# Altium PCB Aurora.PcbDoc
Units mil, origin at the board's own origin, x right, y up, seen from the top; angles counter-clockwise.
Board outline 1889.76 x 1181.1 mil, 2 copper layers (Top Layer, Bottom Layer), stack 61.811 mil thick; 17 components, 17 nets, 84 pads, 10 vias.
Unrouted connection lines stored in the file: 2.
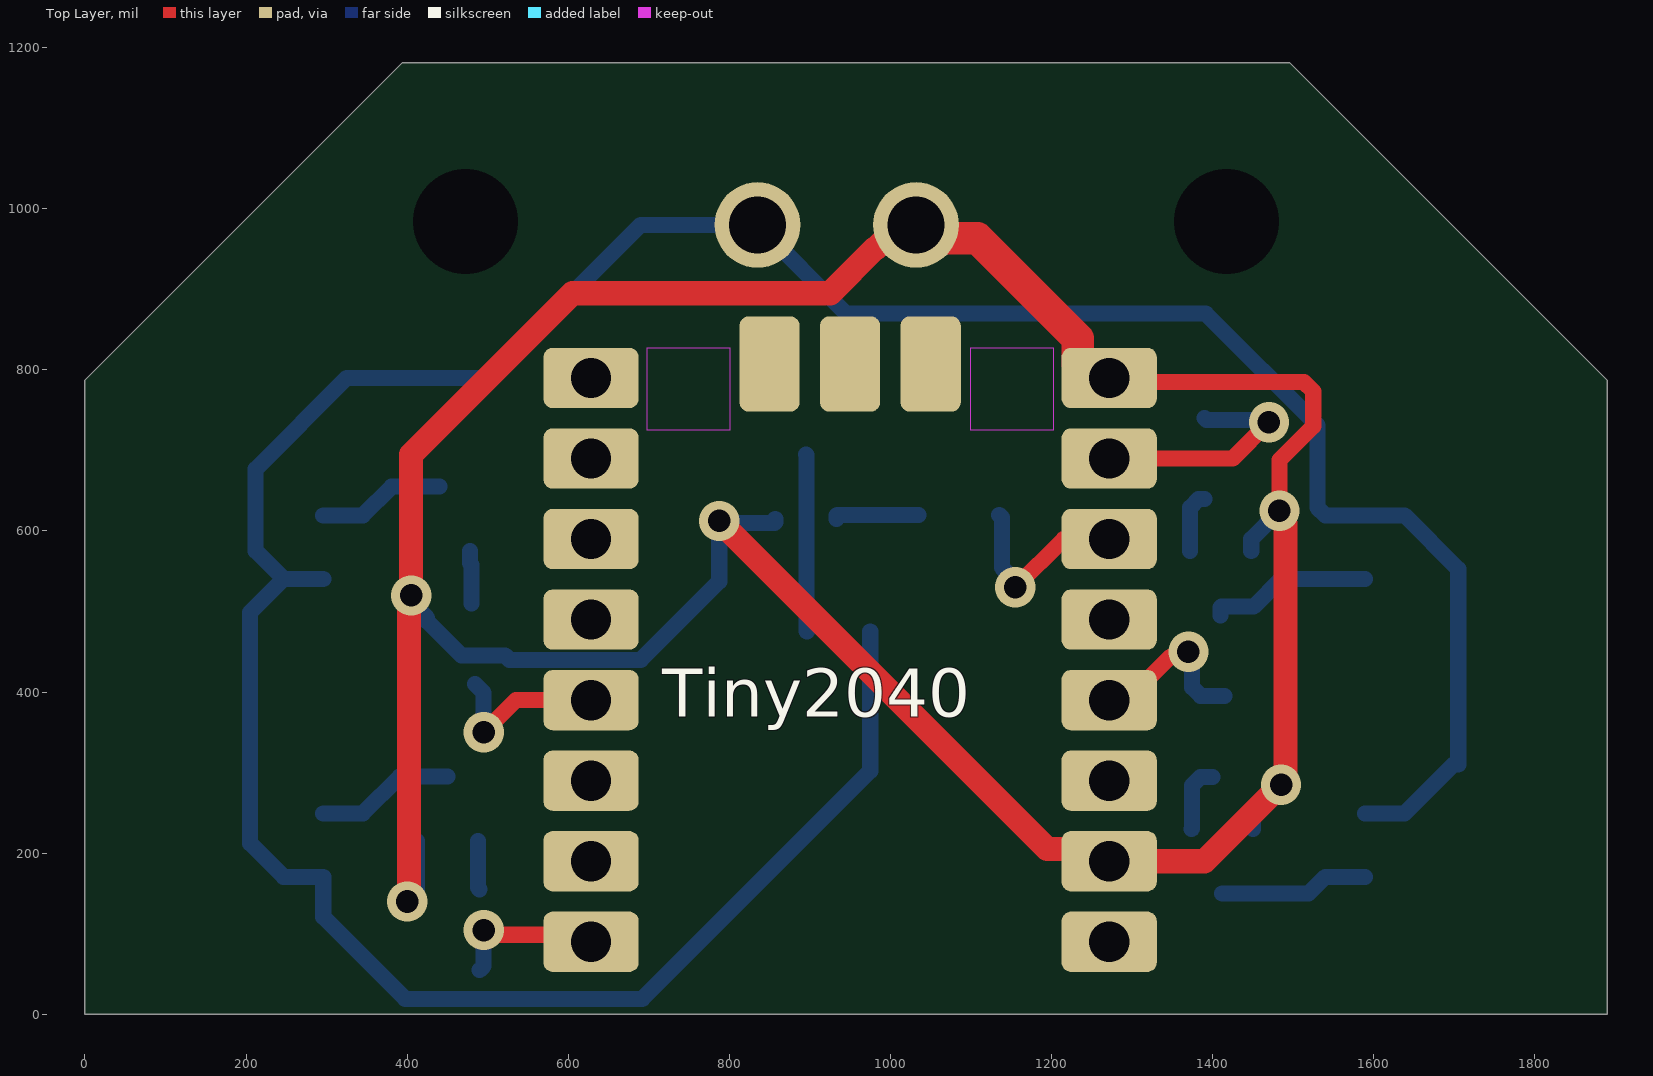
[diagram p0: Top Layer view]
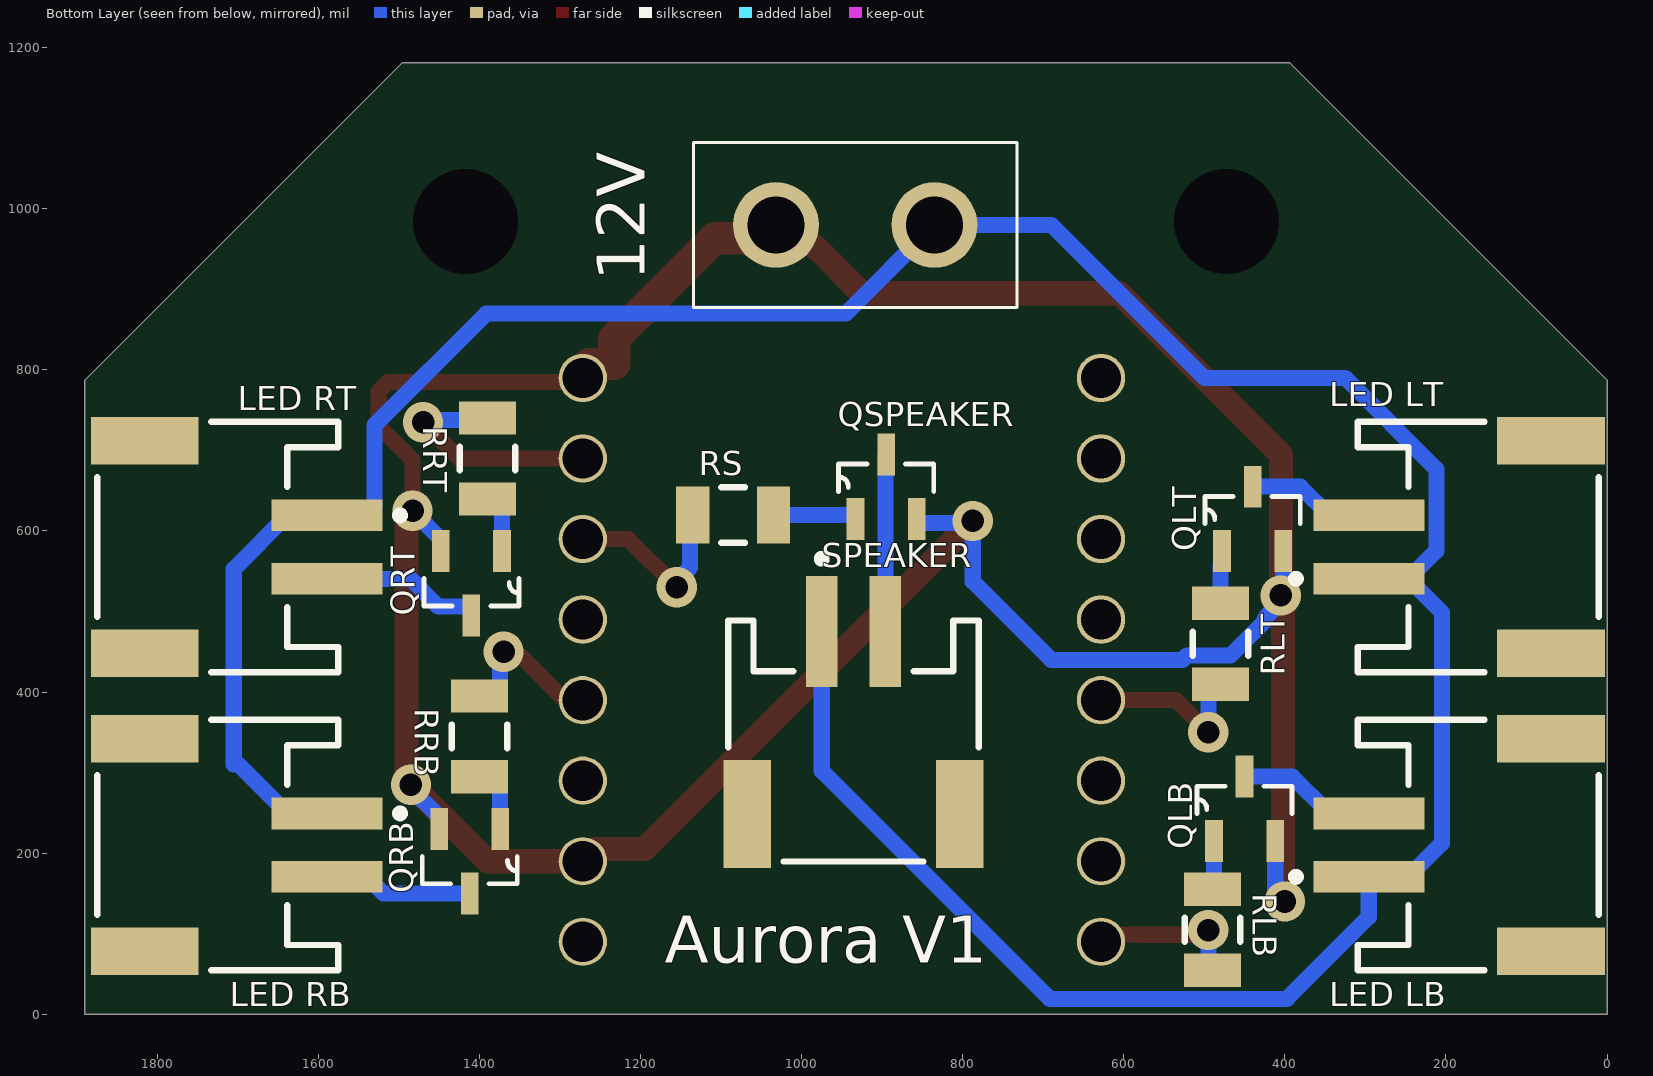
[diagram p1: Bottom Layer view, seen from below]
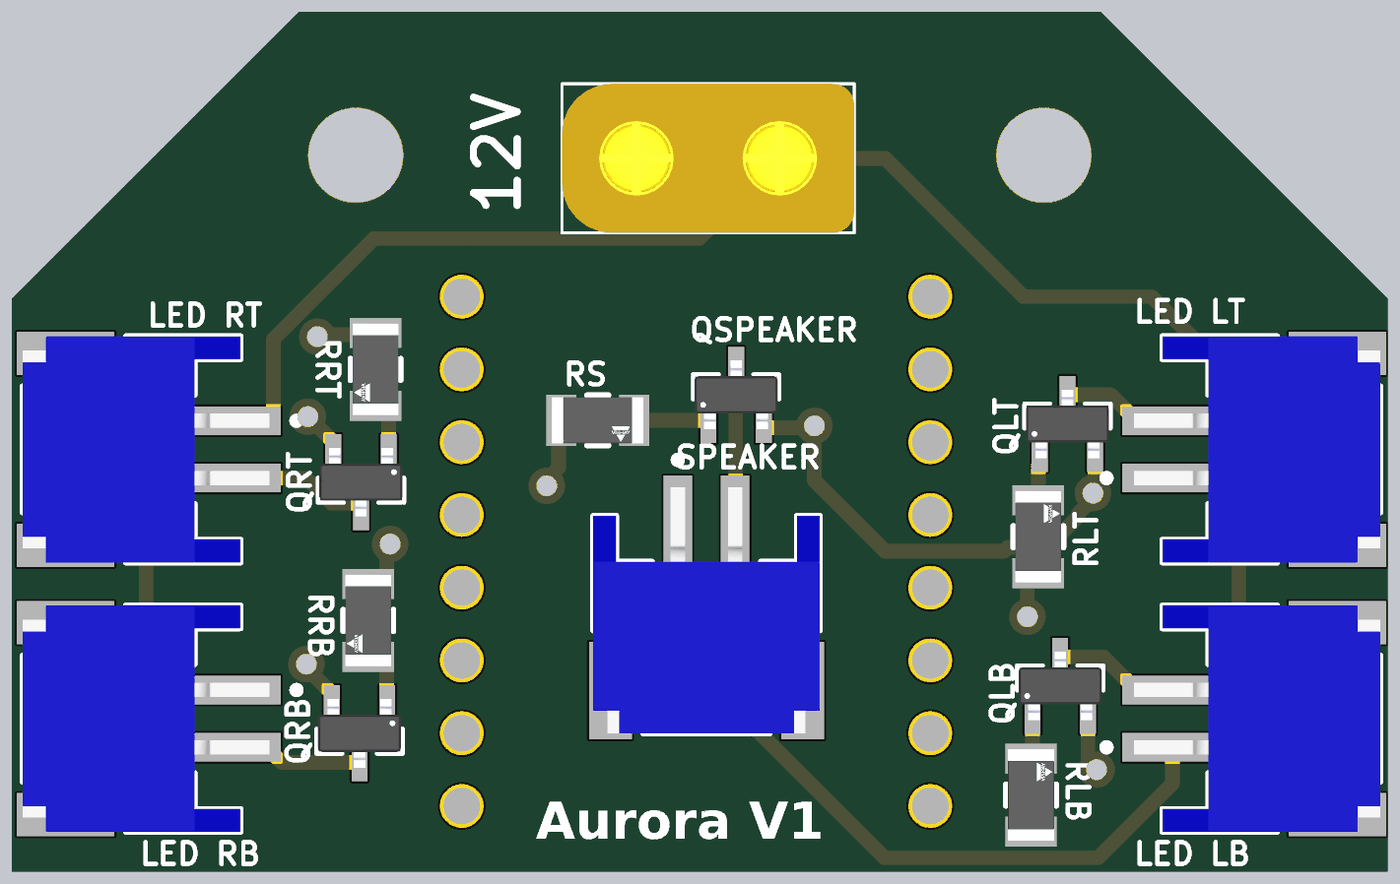
[diagram p2: 3D render of the assembled board from below, using the file's embedded part models]

## Layer stack, top to bottom
Top Solder: solder mask 0.5, Solder Resist, Dk 3.8
Top Layer: signal copper 1.378
Dielectric: core 59.0551, FR-4, Dk 4.5
Bottom Layer: signal copper 1.378
Bottom Solder: solder mask 0.5, Solder Resist, Dk 3.8

## Board outline
0,0 1889.76,0 1889.76,787.4 1496.06,1181.1 393.7,1181.1 0,787.4

## Design rules (kind name [scope] priority, off if disabled: settings)
BoardOutlineClearance [All] p1: gap=7.87 ignorepadtopadclearanceinfootprint=FALSE
Clearance [All] p1: gap=5 ignorepadtopadclearanceinfootprint=FALSE except(9.84: Arc-Hole Track-Hole SMDPad-Hole THPad-Hole Via-Hole Fill-Hole Poly-Hole Region-Hole Text-Hole)
ComponentClearance [All] p1: gap=5 collisioncheckmode=3 verticalgap=5 showdistances=TRUE
DiffPairsRouting [All] p1: maxlimit=10 minlimit=5 mostfreqgap=5 toplayer_minwidth=5 toplayer_maxwidth=1000 toplayer_prefwidth=5 bottomlayer_minwidth=5 bottomlayer_maxwidth=1000 bottomlayer_prefwidth=5 maxuncoupledlength=500
Height [All] p1: minheight=0 maxheight=71497.94 prefheight=500
HoleSize [All] p1: absolutevalues=TRUE maxlimit=248.03 minlimit=11.81 maxpercent=80.000 minpercent=20.000
HoleToHoleClearance [All] p1: gap=9.84 allowstackedmicrovias=FALSE
MinimumAnnularRing [All] p1: minimumring=3
MinimumSolderMaskSliver [All] p1: minsoldermaskwidth=0
PlaneClearance [All] p1: clearance=5
PlaneConnect PlaneConnectPowerPads [InPadClass('PowerPads')] p1: planeconnectstyle=Direct reliefexpansion=20 reliefentries=4 reliefconductorwidth=10 reliefairgap=10
PlaneConnect [All] p2: pad.planeconnectstyle=Relief pad.reliefexpansion=11.81 pad.reliefentries=4 pad.reliefconductorwidth=5 pad.reliefairgap=5 via.planeconnectstyle=Direct via.reliefexpansion=11.81 via.reliefentries=4 via.reliefconductorwidth=5 via.reliefairgap=5
PolygonConnect PolygonConnectPowerPads [All vs (InPadClass('PowerPads'))] p1: connectstyle=Direct reliefconductorwidth=10 reliefentries=4 polygonreliefangle="90 Angle" airgapwidth=10
PolygonConnect [All] p2: thpad.connectstyle=Relief thpad.reliefconductorwidth=5 thpad.reliefentries=4 thpad.polygonreliefangle="90 Angle" thpad.airgapwidth=5 smdpad.connectstyle=Relief smdpad.reliefconductorwidth=5 smdpad.reliefentries=4 smdpad.polygonreliefangle="90 Angle" smdpad.airgapwidth=5 via.connectstyle=Direct via.reliefconductorwidth=5 via.reliefentries=4 via.polygonreliefangle="90 Angle" via.airgapwidth=5
RoutingVias [All] p1: holewidth=11.81 width=23.62 viastyle="Through Hole" minholewidth=11.81 minwidth=23.62 maxholewidth=23.62 maxwidth=259.84
SMDNeckDown [All] p1: percent=50.000
SilkToSilkClearance [All] p1: silktosilkclearance=0
SilkToSolderMaskClearance [IsPad] p1: minsilkscreentomaskgap=5 clearancetoexposedcopper=TRUE
SolderMaskExpansion SolderMaskExpansion_1 [IsVia] p1: expansion=2.95 istentingtop=TRUE
SolderMaskExpansion [All] p2: expansion=2.95 istentingtop=FALSE
Width [All] p1: maxlimit=1000 minlimit=5 preferedwidth=20 minimp=50.000000 maximp=50.000000 favimp=50.000000
20 further rules are at their usual default settings.

## Components (designator, comment, footprint, x,y, rotation, side; value= is the part's Value field where it differs from the comment)
12V "XT30PB" XT30PB 835,980 r270 bottom
"LED LB" "S2B-PH-SM4-TB(LF)(SN)" "JST- S2B-PH-SM4-TB(LF)(SN)-2_V" 160,210 r90 bottom
"LED LT" "S2B-PH-SM4-TB(LF)(SN)" "JST- S2B-PH-SM4-TB(LF)(SN)-2_V" 160,580 r90 bottom
"LED RB" "S2B-PH-SM4-TB(LF)(SN)" "JST- S2B-PH-SM4-TB(LF)(SN)-2_V" 1725,210 r270 bottom
"LED RT" "S2B-PH-SM4-TB(LF)(SN)" "JST- S2B-PH-SM4-TB(LF)(SN)-2_V" 1725,580 r270 bottom
QLB "DMG6968U-7" SOT95P240X110-3N 450,255 r90 bottom
QLT "DMG6968U-7" SOT95P240X110-3N 440,615 r90 bottom
QRB "DMG6968U-7" SOT95P240X110-3N 1412,190 r270 bottom
QRT "DMG6968U-7" SOT95P240X110-3N 1410,535 r270 bottom
QSPEAKER "DMG6968U-7" SOT95P240X110-3N 895,655 r90 bottom
RLB "CRCW1206100RFKEA" FP-CRCW1206-e3-MFG 490,105 r90 bottom
RLT "CRCW1206100RFKEA" FP-CRCW1206-e3-MFG 480,460 r90 bottom
RRB "CRCW1206100RFKEA" FP-CRCW1206-e3-MFG 1400,345 r270 bottom
RRT "CRCW1206100RFKEA" FP-CRCW1206-e3-MFG 1390,690 r270 bottom
RS "CRCW1206100RFKEA" FP-CRCW1206-e3-MFG 1085,620 r180 bottom
SPEAKER "S2B-PH-SM4-TB(LF)(SN)" "JST- S2B-PH-SM4-TB(LF)(SN)-2_V" 935.63,339.17 r180 bottom
Tiny2040 "TINY2040" TINY2040 950,40 r90 top

## Footprints (in the part's own frame and the unit in brackets; to place one, negate y for a bottom-side part, rotate by r counter-clockwise, add the part's x,y. Pads: shape width x height; smd on the part's side, far side on the other; paste and mask are expansions set on the pad)
FP-CRCW1206-e3-MFG [mm]
  rect 1.05x1.8 smd paste+0 mask+0: 1(-1.275,0) 2(1.275,0)
  silkscreen extent -0.38,-0.87 0.38,0.87, body extent -1.6,-0.8 1.6,0.8, height 0.6
"JST- S2B-PH-SM4-TB(LF)(SN)-2_V" [mm] "SMD, 2-Leads, Body 7.9x7.6mm, Pitch 2mm"
  rect 1x3.5 smd: 1(-1,3.45) 2(1,3.45)
  rect 1.5x3.4 smd: MP1(-3.35,-2.3) MP2(3.35,-2.3)
  silkscreen extent -3.95,-3.8 3.95,5.88, body extent -3.95,-3.8 3.95,4.8, height 5.6
SOT95P240X110-3N [mil]
  rect 52x22 smd: 1(-40,38) 2(-40,-38) 3(40,0)
  silkscreen extent -6,-59 28,59, body extent -47,-57 47,57, height 43
TINY2040 [mil]
  rrect30% 74.8x118.11 smd: 0(50,321.65) 1(150,321.65) 2(250,321.65) 3(350,321.65) 3V3(250,-321.65) 4(450,321.65) 5(550,321.65) 5V(50,-321.65) 6(650,321.65) 7(750,321.65) A0(650,-321.65) A1(550,-321.65) A2(450,-321.65) A3(350,-321.65) GND1(150,-321.65) GND2(750,-321.65)
  round 60 hole 50: 8(50,-321.65) 9(150,-321.65) 10(250,-321.65) 11(350,-321.65) 12(450,-321.65) 13(550,-321.65) 14(650,-321.65) 15(750,-321.65) 16(750,321.65) 17(650,321.65) 18(550,321.65) 20(350,321.65) 21(250,321.65) 22(150,321.65) 23(50,321.65) 24(450,321.65)
  rrect30% 118.11x74.8 smd: GND3(767.32,0) SWCLK(767.32,-100) SWDIO(767.32,100)
  Top Layer keep-out region: 685.04,149.61 685.04,251.97 787.4,251.97 787.4,149.61
  Top Layer keep-out region: 685.04,-251.97 685.04,-149.61 787.4,-149.61 787.4,-251.97
XT30PB [mm]
  round 2.7 hole 1.8: 1(0,0) 2(0,-5)
  silkscreen extent -2.6,-7.6 2.6,2.6, body extent -2.6,-7.6 2.6,2.6, height 10.66

## Part data
12V: "Connector", Manufacturer_Name=Amass, Datasheet Link=https://www.tme.eu/Document/4acc913878197f8c2e30d4b8cdc47230/XT30UPB%20SPEC.pdf, Height=10.7mm, Manufacturer_Part_Number=XT30PB
"LED LB" "LED LT" "LED RB" "LED RT" SPEAKER: library part CMP-1755-00001-1, "Male Header, Pitch 2 mm, 1 x 2 Position, Height 5.5 mm, -25 to 85 degC, RoHS, Tape and Reel", Colour=Black, Current Rating="3 A", Max Operating Temperature=105degC, Min Operating Temperature=-65degC, Package Quantity=100, ComponentLink1Description="Manufacturer URL", ComponentLink1URL=http://www.jst.com/home2.html, ComponentLink2Description=Datasheet, ComponentLink2URL=http://www.jst-mfg.com/product/pdf/eng/ePH.pdf, Contact Finish=Lead, Contact Material=Bronze, Contact Plating=Tin, DatasheetVersion=Dec-12, Height="8.13 mm", Lead Pitch="0.1 inch", Length="101.19 mm", Mount="Through Hole", PackageDescription="Male Header, Pitch 2 mm, 1 x 2 Position, Height 5.5 mm", PackageReference=S2B-PH-SM4-TB(LF)(SN)-2, Packaging=Bulk, Pins=40, Radiation Hardening=No, RoHSCompliant=True, Width="2.34 mm"
QLB QLT QRB QRT QSPEAKER: "N-CHANNEL ENHANCEMENT MODE MOSFET", Package=None, Availability=Unavailable, MF="{'manufacturer': u'Diodes Zetex'}", MP=DMG6968U-7, Price=None
RLB RLT RRB RRT RS: library part CMP-2003-04801-2, "RES Thick Film, 100Ω, 1%, 0.25W, 100ppm/°C, 1206", Case Code (Imperial)=1206, Case Code (Metric)=3216, Max Operating Temperature=155°C, Min Operating Temperature=-55°C, Package Quantity=5000, Power Rating=250mW, Resistance=100R, Temperature Coefficient=100ppm/°C, Tolerance=1%, Voltage Rating=200V, Case/Package=1206, Composition="Thick Film", Contact Plating=Tin, Depth=1.6mm, Height=0.55mm, Lead Free="Lead Free", Length=3.2mm, Military Standard=Not, Mount="Surface Mount", Number of Pins=2, Packaging="Tape and Reel", Radiation Hardening=No, Termination=SMD/SMT, Voltage Rating (DC)=200V, Weight=0.000353oz, Width=1.6mm
Tiny2040: DeviceSetName=TINY2040, GateName_1=G$1, LibraryName=pimoroni-boards2040, Package=TINY2040, SymbolName_1=TINY2040

## Free pads (board coordinates)
  round 60 hole 129.92: 3(472.44,984.25) 6(1417.32,984.25)

## Via types
v1: diameter 50, hole 28, Top Layer to Bottom Layer, tented both sides, 10 vias

## Nets (pads, with @x,y where several pads share a name; then routed paths per layer and width w, separated by ;. In a path a pad name is that pad's centre, name@x,y a point inside that pad or via, vN(x,y) a via of type N, cw(c..) or ccw(c..) an arc to the next point about the centre after c; other vN are vias at no path point)
+12: 12V.1 "LED LB.1" "LED LT.1" "LED RB.1" "LED RT.1" SPEAKER.1 | length 3953.8
  Bottom Layer w20: 295.83,540.63 246.61,540.63 ; SPEAKER.1 975,302.21 691.92,19.13 397.64,19.13 295.83,120.94 295.83,170.63 246.61,170.63 205,212.24 205,499.02 246.61,540.63 ; 1589.17,249.37 1638.39,249.37 1699.02,310 1705,310 1705,552.76 1638.39,619.37 1589.17,619.37 1539.96,619.37 1530.28,629.06 1530.28,731.29 1391.57,870 945,870 12V.1 690,980 500,790 325,790 211.93,676.93 211.93,575.32 246.61,540.63
GND: 12V.2 QLB.2 QLT.2 QRB.2 QRT.2 QSPEAKER.2 Tiny2040.GND2 | length 3548.9
  Top Layer w20: v1(400,140) v1@402.5,142.5 ; v1@402.5,517.5 v1(405,520) ; 12V.2 12V.2@1048.36,963.49 ; Tiny2040.GND2@1263.88,807.7 1263.88,807.4 1263.88,797.77 Tiny2040.GND2 1276.65,785 1513.28,785 1525,773.28 1525,730.06 1483,688.06 v1(1483,625) 1483,616.88 v1@1490.74,609.14 ; v1(1485,285) v1@1490.74,290.74
  Top Layer w30: v1@402.5,142.5 v1@402.5,517.5 ; v1(405,520) 405,695 605.26,895.26 925.26,895.26 981.52,951.52 982.73,951.52 1011.2,980 12V.2 ; 1271.65,190 1390,190 v1(1485,285) ; v1@1490.74,290.74 v1@1490.74,609.14
  Top Layer w40: 12V.2@1048.36,963.49 1108.09,963.49 1232.6,838.98 1232.6,807.4 Tiny2040.GND2@1263.88,807.4
  Bottom Layer w20: v1(400,140) 412,152 QLB.2 ; QLT.2 402,523 v1(405,520) 405,511.88 424.88,492 424.88,488 467.41,445.47 521.65,445.47 527.12,440 690,440 787.51,537.51 v1(787.51,612.49) ; v1@790,610 856,610 857,611 QSPEAKER.2 ; QRT.2 1448,590 v1(1483,625) ; QRB.2 1450,245 1485,280 v1(1485,285)
"NetLED LB_2": "LED LB.2" QLB.3 | length 173.1
  Bottom Layer w20: 295.83,249.37 345.04,249.37 390.67,295 QLB.3
"NetLED LT_2": "LED LT.2" QLT.3 | length 158.9
  Bottom Layer w20: 295.83,619.37 345.04,619.37 380.67,655 QLT.3
"NetLED RB_2": "LED RB.2" QRB.3 | length 185.7
  Bottom Layer w20: QRB.3 1519.33,150 1539.96,170.63 1589.17,170.63
"NetLED RT_2": "LED RT.2" QRT.3 | length 204
  Bottom Layer w20: QRT.3 1410,505.18 1411,506.18 1451,506.18 1485.45,540.63 1589.17,540.63
NetQLB_1: QLB.1 RLB.2 | length 60.6
  Bottom Layer w20: QLB.1 488,157.2 RLB.2
NetQLT_1: QLT.1 RLT.2 | length 65.6
  Bottom Layer w20: QLT.1 478,560 480,558 RLT.2
NetQRB_1: QRB.1 RRB.2 | length 84.2
  Bottom Layer w20: QRB.1 1374.57,230.57 1374.57,284.13 1385.24,294.8 RRB.2
NetQRT_1: QRT.1 RRT.2 | length 76.6
  Bottom Layer w20: QRT.1 1372,629.13 1382.67,639.8 RRT.2
NetQSPEAKER_1: QSPEAKER.1 RS.2 | length 106.2
  Bottom Layer w20: QSPEAKER.1 933,619 934,620 RS.2
NetQSPEAKER_3: QSPEAKER.3 SPEAKER.2 | length 220.5
  Bottom Layer w20: QSPEAKER.3 895.63,694.37 895.63,475.63 SPEAKER.2
NetRLB_1: RLB.1 Tiny2040.0 | length 213.2
  Top Layer w20: v1(495,104.53) 500.74,98.79 579.39,98.79 579.86,99.26 619.09,99.26 Tiny2040.0 ; 606.7,190 628.35,190
  Bottom Layer w20: RLB.1 495,59.8 v1(495,104.53)
NetRLT_1: RLT.1 Tiny2040.3 | length 232.5
  Top Layer w20: v1(495,350) 535,390 Tiny2040.3 ; 610,590 628.35,590
  Bottom Layer w20: RLT.1@484.33,409.8 495,399.14 v1(495,350)
NetRRB_1: RRB.1 Tiny2040.A3 | length 213.8
  Top Layer w20: Tiny2040.A3 1293.97,390 1348.23,444.26 1364.26,444.26 v1(1370,450)
  Bottom Layer w20: v1(1370,450) 1374.57,445.43 1374.57,405.87 1385.24,395.2 RRB.1@1414.76,395.2
NetRRT_1: RRT.1 Tiny2040.A0 | length 299.1
  Top Layer w20: Tiny2040.A0 1425,690 v1(1470,735)
  Bottom Layer w20: RRT.1 1392.6,737.6 1467.4,737.6 v1(1470,735)
NetRS_1: RS.1 Tiny2040.A1 | length 239.7
  Top Layer w20: v1(1155,530) 1215,590 Tiny2040.A1
  Bottom Layer w20: RS.1 1138.55,616.64 1138.55,554.57 1155,538.12 v1(1155,530)
pads on no net: "LED LB.MP1" "LED LB.MP2" "LED LT.MP1" "LED LT.MP2" "LED RB.MP1" "LED RB.MP2" "LED RT.MP1" "LED RT.MP2" SPEAKER.MP1 SPEAKER.MP2 Tiny2040.1 Tiny2040.2 Tiny2040.3V3 Tiny2040.4 Tiny2040.5 Tiny2040.5V Tiny2040.6 Tiny2040.7 Tiny2040.8 Tiny2040.9 Tiny2040.10 Tiny2040.11 Tiny2040.12 Tiny2040.13 Tiny2040.14 Tiny2040.15 Tiny2040.16 Tiny2040.17 Tiny2040.18 Tiny2040.20 Tiny2040.21 Tiny2040.22 Tiny2040.23 Tiny2040.24 Tiny2040.A2 Tiny2040.GND1 Tiny2040.GND3 Tiny2040.SWCLK Tiny2040.SWDIO
copper on no net: | length 659.1
  Top Layer w20: 1256.32,205.33 1271.65,190
  Top Layer w30: 787.51,612.49 1194.67,205.33 1256.32,205.33

## Silkscreen, mask and mechanical layers (free items; w line width, h text height)
Bottom Overlay:
  text "Aurora V1" at 1170,45 h100
Mechanical 1:
  lines w47.24: -23.62,0 ccw(c0,0) 0,-23.62 ; -23.62,0 ccw(c0,0) 0,-23.62 ; -23.62,0 -23.62,787.4 ; -23.62,787.4 cw(c0,787.4) -16.7,804.11 ; -23.62,787.4 cw(c0,787.4) -16.7,804.11 ; -16.7,804.11 377,1197.81 ; 0,-23.62 1889.76,-23.62 ; 377,1197.81 cw(c393.7,1181.1) 393.7,1204.73 ; 377,1197.81 cw(c393.7,1181.1) 393.7,1204.73 ; 393.7,1204.73 1496.06,1204.73 ; 1496.06,1204.73 cw(c1496.06,1181.1) 1512.77,1197.81 ; 1496.06,1204.73 cw(c1496.06,1181.1) 1512.77,1197.81 ; 1512.77,1197.81 1906.47,804.11 ; 1889.76,-23.62 ccw(c1889.76,0) 1913.39,0 ; 1889.76,-23.62 ccw(c1889.76,0) 1913.39,0 ; 1906.47,804.11 cw(c1889.76,787.4) 1913.39,787.4 ; 1906.47,804.11 cw(c1889.76,787.4) 1913.39,787.4 ; 1913.39,0 1913.39,787.4

## Dimensions
1889.76,-23.62 to -23.62,0 on Mechanical 13
1889.76,-23.62 to 1512.77,1197.81 on Mechanical 13
1417.32,984.25 to 1889.76,787.4 on Mechanical 13
1889.76,787.4 to 1496.06,1181.1 on Mechanical 13
1889.76,787.4 to 1899.76,0 on Mechanical 13
1417.32,984.25 to 0,0 on Mechanical 13
472.44,984.25 to 1496.06,1181.1 on Mechanical 13